# Altium PCB LCD-Controller.PcbDoc (part 2 of 3)
Units mm, origin at the board's own origin, x right, y up, seen from the top; angles counter-clockwise.
Board outline 100.3 x 38.1 mm, 4 copper layers (Top Layer, Signal Layer 1, Signal Layer 2, Bottom Layer), stack 0.778 mm thick; 118 components, 92 nets, 506 pads, 174 vias.
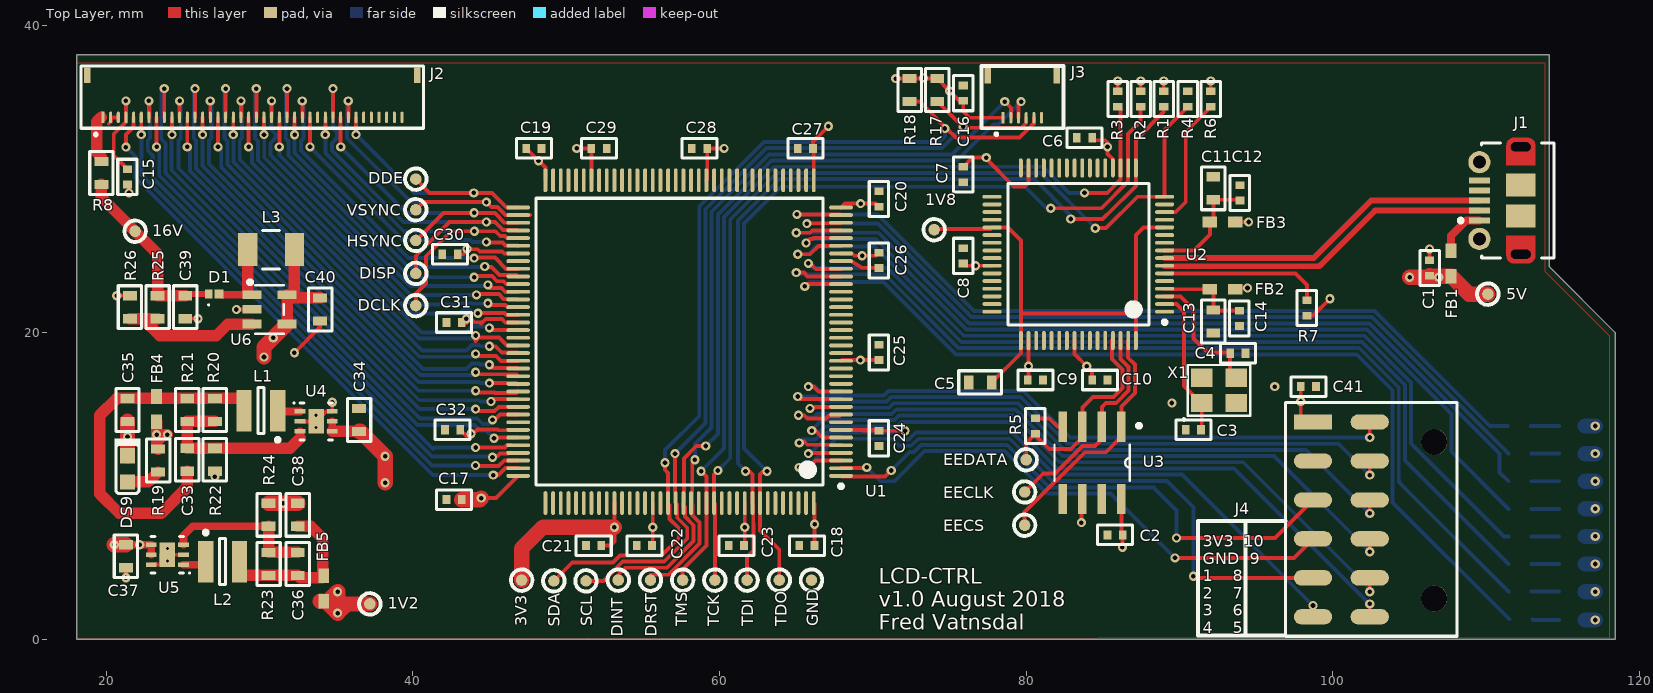
[diagram p0: Top Layer view]

## Part data (continued)
R8: library part ERA3AEB391V, "PANASONIC ELECTRONIC COMPONENTS         ERA3AEB391V             SMD Chip Resistor, Thin Film, 390 ohm, 75 V, 0603 [1608 Metric], 100 mW,  0.1%, ERA Series", Case/Package=0603, Case Code (Metric)=1608, Manufacturer=Panasonic, Max Operating Temperature=155°C, Max Power Dissipation=100mW, Min Operating Temperature=-55°C, Package Quantity=1, Resistance=390R, Supplier Part Number 1=P390DBDKR-ND, Temperature Coefficient=25ppm/°C, Tolerance=0.1%, Voltage Rating=75V, Case Code (Imperial)=0603, ComponentLink1Description=https://datasheet.ciiva.com/6001/485442-6001685.pdf, ComponentLink1URL=https://datasheet.ciiva.com/6001/485442-6001685.pdf, ComponentLink2Description=https://datasheet.ciiva.com/6001/485442-6001686.pdf, ComponentLink2URL=https://datasheet.ciiva.com/6001/485442-6001686.pdf, ComponentLink3Description=https://datasheet.ciiva.com/9182/aoa0000ce26-9182342.pdf, ComponentLink3URL=https://datasheet.ciiva.com/9182/aoa0000ce26-9182342.pdf, ComponentLink4Description=https://datasheet.ciiva.com/48425/era-eng-tds-48425462.pdf, ComponentLink4URL=https://datasheet.ciiva.com/48425/era-eng-tds-48425462.pdf, ComponentLink5Description=https://datasheet.ciiva.com/7909/485442-7909096.pdf, ComponentLink5URL=https://datasheet.ciiva.com/7909/485442-7909096.pdf, ComponentLink6Description=https://datasheet.ciiva.com/7909/485442-7909097.pdf, ComponentLink6URL=https://datasheet.ciiva.com/7909/485442-7909097.pdf, ComponentLink7Description=https://datasheet.ciiva.com/7909/485442-7909098.pdf, ComponentLink7URL=https://datasheet.ciiva.com/7909/485442-7909098.pdf, ComponentLink8Description=https://datasheet.ciiva.com/22737/39837-22737548.pdf, ComponentLink8URL=https://datasheet.ciiva.com/22737/39837-22737548.pdf, ComponentLink9Description=https://datasheet.ciiva.com/11808/0900766b80fe20f7-11808046.pdf, ComponentLink9URL=https://datasheet.ciiva.com/11808/0900766b80fe20f7-11808046.pdf, ComponentLink10Description=https://datasheet.ciiva.com/17205/aoa0000ce26-17205855.pdf, ComponentLink10URL=https://datasheet.ciiva.com/17205/aoa0000ce26-17205855.pdf, ComponentLink11Description=https://datasheet.ciiva.com/29183/450555-da-01-en-widerstand-0603-era-29183689.pdf, ComponentLink11URL=https://datasheet.ciiva.com/29183/450555-da-01-en-widerstand-0603-era-29183689.pdf, Composition="Thin Film", Contact Plating=Tin, Depth=0.8mm, Height=0.45mm, Lead Free="Lead Free", Length=1.6mm, Manufacturer Part Number=ERA3AEB391V, Military Standard=Not, Mount="Surface Mount", Number of Pins=2, Number of Terminations=2, Packaging="Tape and Reel", Power Rating=100mW, Pricing 1="1=0.41, 10=0.346, 100=0.1351, 1000=0.05655, 2500=0.05184 (USD)", Radiation Hardening=No, REACH SVHC="No SVHC", Stock 1=37643, Supplier 1=Digi-Key, Termination=Solder, Voltage Rating (DC)=75V, Width=0.8mm
R9 R10 R11 R12 R13 R14 R15 R16 R19: library part ERA-3AEB221V, "Res Thin Film 0603 220 Ohm 0.1% 1/10W ±25ppm/C Molded SMD Punched Carrier T/R", Case/Package=0603, Case Code (Metric)=1608, Manufacturer=Panasonic, Max Operating Temperature=155°C, Max Power Dissipation=100mW, Min Operating Temperature=-55°C, Package Quantity=1, Resistance=220R, Supplier Part Number 1=P220DBDKR-ND, Temperature Coefficient=25ppm/°C, Tolerance=0.1%, Voltage Rating=75V, Case Code (Imperial)=0603, ComponentLink1Description=https://datasheet.ciiva.com/30089/54aoa0000ce26-30089206.pdf, ComponentLink1URL=https://datasheet.ciiva.com/30089/54aoa0000ce26-30089206.pdf, ComponentLink2Description=https://datasheet.ciiva.com/11808/0900766b80fe20f7-11808055.pdf, ComponentLink2URL=https://datasheet.ciiva.com/11808/0900766b80fe20f7-11808055.pdf, ComponentLink3Description=https://datasheet.ciiva.com/48530/era-eng-tds-48530567.pdf, ComponentLink3URL=https://datasheet.ciiva.com/48530/era-eng-tds-48530567.pdf, ComponentLink4Description=https://datasheet.ciiva.com/9117/aoa0000ce26-9117624.pdf, ComponentLink4URL=https://datasheet.ciiva.com/9117/aoa0000ce26-9117624.pdf, ComponentLink5Description=https://datasheet.ciiva.com/22739/485442-22739289.pdf, ComponentLink5URL=https://datasheet.ciiva.com/22739/485442-22739289.pdf, ComponentLink6Description=https://datasheet.ciiva.com/7886/485442-7886586.pdf, ComponentLink6URL=https://datasheet.ciiva.com/7886/485442-7886586.pdf, ComponentLink7Description=https://datasheet.ciiva.com/9184/aoa0000ce26-9184316.pdf, ComponentLink7URL=https://datasheet.ciiva.com/9184/aoa0000ce26-9184316.pdf, ComponentLink8Description=https://datasheet.ciiva.com/43455/485442-43455212.pdf, ComponentLink8URL=https://datasheet.ciiva.com/43455/485442-43455212.pdf, ComponentLink9Description=https://datasheet.ciiva.com/6000/485442-6000910.pdf, ComponentLink9URL=https://datasheet.ciiva.com/6000/485442-6000910.pdf, ComponentLink10Description=https://datasheet.ciiva.com/17206/aoa0000ce26-17206814.pdf, ComponentLink10URL=https://datasheet.ciiva.com/17206/aoa0000ce26-17206814.pdf, ComponentLink11Description=https://datasheet.ciiva.com/48425/era-eng-tds-48425439.pdf, ComponentLink11URL=https://datasheet.ciiva.com/48425/era-eng-tds-48425439.pdf, ComponentLink12Description=https://datasheet.ciiva.com/29183/450451-da-01-en-widerstand-0603-era-29183676.pdf, ComponentLink12URL=https://datasheet.ciiva.com/29183/450451-da-01-en-widerstand-0603-era-29183676.pdf, Composition="Metal Film,Thin Film", Contact Plating=Tin, Depth=0.8mm, Features="Automotive AEC-Q200", Height=0.45mm, Lead Free="Lead Free", Length=1.6mm, Manufacturer Part Number=ERA-3AEB221V, Military Standard=Not, Mount="Surface Mount", Number of Pins=2, Number of Terminations=2, Packaging="Tape and Reel", Power Rating=100mW, Pricing 1="1=0.41, 10=0.346, 100=0.1351, 1000=0.05655, 2500=0.05184 (USD)", Radiation Hardening=No, REACH SVHC="No SVHC", Stock 1=240, Supplier 1=Digi-Key, Termination=SMD/SMT, Voltage Rating (DC)=75V, Width=0.8mm
R17 R18 R26: library part ERA-3AEB472V, "Res Thin Film 0603 4.7K Ohm 0.1% 0.1W(1/10W) ±25ppm/C Molded SMD Automotive Punched T/R", Case/Package=0603, Case Code (Metric)=1608, Manufacturer=Panasonic, Max Operating Temperature=155°C, Max Power Dissipation=100mW, Min Operating Temperature=-55°C, Package Quantity=5000, Resistance=4.7kR, Supplier Part Number 1=P4.7KDBDKR-ND, Temperature Coefficient=25ppm/°C, Tolerance=0.1%, Voltage Rating=75V, Case Code (Imperial)=0603, ComponentLink1Description=https://datasheet.ciiva.com/22743/485442-22743061.pdf, ComponentLink1URL=https://datasheet.ciiva.com/22743/485442-22743061.pdf, ComponentLink2Description=https://datasheet.ciiva.com/46422/485442-46422693.pdf, ComponentLink2URL=https://datasheet.ciiva.com/46422/485442-46422693.pdf, ComponentLink3Description=https://datasheet.ciiva.com/11808/0900766b80fe20f7-11808039.pdf, ComponentLink3URL=https://datasheet.ciiva.com/11808/0900766b80fe20f7-11808039.pdf, ComponentLink4Description=https://datasheet.ciiva.com/9116/aoa0000ce26-9116681.pdf, ComponentLink4URL=https://datasheet.ciiva.com/9116/aoa0000ce26-9116681.pdf, ComponentLink5Description=https://datasheet.ciiva.com/22781/485442-22781497.pdf, ComponentLink5URL=https://datasheet.ciiva.com/22781/485442-22781497.pdf, ComponentLink6Description=https://datasheet.ciiva.com/9117/aoa0000ce26-9117707.pdf, ComponentLink6URL=https://datasheet.ciiva.com/9117/aoa0000ce26-9117707.pdf, ComponentLink7Description=https://datasheet.ciiva.com/43455/485442-43455227.pdf, ComponentLink7URL=https://datasheet.ciiva.com/43455/485442-43455227.pdf, ComponentLink8Description=https://datasheet.ciiva.com/16772/70068849-16772572.pdf, ComponentLink8URL=https://datasheet.ciiva.com/16772/70068849-16772572.pdf, ComponentLink9Description=https://datasheet.ciiva.com/48425/era-eng-tds-48425470.pdf, ComponentLink9URL=https://datasheet.ciiva.com/48425/era-eng-tds-48425470.pdf, ComponentLink10Description=https://datasheet.ciiva.com/30078/54aoa0000ce26-30078815.pdf, ComponentLink10URL=https://datasheet.ciiva.com/30078/54aoa0000ce26-30078815.pdf, ComponentLink11Description=https://datasheet.ciiva.com/29183/451124-da-01-en-widerstand-0603-era-29183789.pdf, ComponentLink11URL=https://datasheet.ciiva.com/29183/451124-da-01-en-widerstand-0603-era-29183789.pdf, Composition="Metal Film,Thin Film", Contact Plating=Tin, Depth=0.8mm, Height=0.45mm, Lead Free="Lead Free", Length=1.6mm, Manufacturer Part Number=ERA-3AEB472V, Military Standard=Not, Mount="Surface Mount", Number of Pins=2, Number of Terminations=2, Packaging="Tape and Reel", Power Rating=100mW, Pricing 1="1=0.41, 10=0.346, 100=0.1351, 1000=0.05655, 2500=0.05184 (USD)", Radiation Hardening=No, REACH SVHC="No SVHC", Stock 1=123784, Supplier 1=Digi-Key, Termination=SMD/SMT, Voltage Rating (DC)=75V, Width=0.8mm, Working Voltage=75V
R20: library part ERJ-3EKF8203V, "RESISTOR, 0603, 0.1W, 1%, 820K", Case/Package=0603, Case Code (Metric)=1608, Manufacturer=Panasonic, Max Operating Temperature=155°C, Max Power Dissipation=100mW, Min Operating Temperature=-55°C, Package Quantity=1, Resistance=820kR, Supplier Part Number 1=P820KHCT-ND, Temperature Coefficient=100ppm/°C, Tolerance=1%, Voltage Rating=75V, Case Code (Imperial)=0603, ComponentLink1Description=https://datasheet.ciiva.com/22681/1678782-22681190.pdf, ComponentLink1URL=https://datasheet.ciiva.com/22681/1678782-22681190.pdf, ComponentLink2Description=https://datasheet.ciiva.com/9179/aoa0000ce2-9179848.pdf, ComponentLink2URL=https://datasheet.ciiva.com/9179/aoa0000ce2-9179848.pdf, ComponentLink3Description=https://datasheet.ciiva.com/30211/aoa0000ce2-30211400.pdf, ComponentLink3URL=https://datasheet.ciiva.com/30211/aoa0000ce2-30211400.pdf, ComponentLink4Description=https://datasheet.ciiva.com/22687/426256-22687466.pdf, ComponentLink4URL=https://datasheet.ciiva.com/22687/426256-22687466.pdf, ComponentLink5Description=https://datasheet.ciiva.com/24124/aoa0000ce2-24124218.pdf, ComponentLink5URL=https://datasheet.ciiva.com/24124/aoa0000ce2-24124218.pdf, ComponentLink6Description=https://datasheet.ciiva.com/7710/aoa0000ce2-7710765.pdf, ComponentLink6URL=https://datasheet.ciiva.com/7710/aoa0000ce2-7710765.pdf, ComponentLink7Description=https://datasheet.ciiva.com/9179/aoa0000ce2-9179854.pdf, ComponentLink7URL=https://datasheet.ciiva.com/9179/aoa0000ce2-9179854.pdf, ComponentLink8Description=https://datasheet.ciiva.com/16781/70260748-16781326.pdf, ComponentLink8URL=https://datasheet.ciiva.com/16781/70260748-16781326.pdf, Composition="Thick Film", Contact Plating=Tin, Depth=0.8mm, Features="Automotive AEC-Q200", Height=0.022inch, Length=1.6mm, Manufacturer Part Number=ERJ-3EKF8203V, Military Standard=Not, Mount="Surface Mount", Number of Pins=2, Number of Terminations=2, Packaging="Tape and Reel", Power Rating=100mW, Pricing 1="1=0.1, 10=0.079, 100=0.0323, 1000=0.01449, 2500=0.01258 (USD)", REACH SVHC=Yes, Stock 1=143016, Supplier 1=Digi-Key, Termination=SMD/SMT, Voltage Rating (DC)=75V, Weight=7.1E-05oz, Width=0.031inch
R21: library part ERJ-3EKF8203V, "RESISTOR, 0603, 0.1W, 1%, 820K", Case/Package=0603, Case Code (Metric)=1608, Manufacturer=Panasonic, Max Operating Temperature=155°C, Max Power Dissipation=100mW, Min Operating Temperature=-55°C, Package Quantity=1, Resistance=DNI, Supplier Part Number 1=P820KHCT-ND, Temperature Coefficient=100ppm/°C, Tolerance=1%, Voltage Rating=75V, Case Code (Imperial)=0603, ComponentLink1Description=https://datasheet.ciiva.com/22681/1678782-22681190.pdf, ComponentLink1URL=https://datasheet.ciiva.com/22681/1678782-22681190.pdf, ComponentLink2Description=https://datasheet.ciiva.com/9179/aoa0000ce2-9179848.pdf, ComponentLink2URL=https://datasheet.ciiva.com/9179/aoa0000ce2-9179848.pdf, ComponentLink3Description=https://datasheet.ciiva.com/30211/aoa0000ce2-30211400.pdf, ComponentLink3URL=https://datasheet.ciiva.com/30211/aoa0000ce2-30211400.pdf, ComponentLink4Description=https://datasheet.ciiva.com/22687/426256-22687466.pdf, ComponentLink4URL=https://datasheet.ciiva.com/22687/426256-22687466.pdf, ComponentLink5Description=https://datasheet.ciiva.com/24124/aoa0000ce2-24124218.pdf, ComponentLink5URL=https://datasheet.ciiva.com/24124/aoa0000ce2-24124218.pdf, ComponentLink6Description=https://datasheet.ciiva.com/7710/aoa0000ce2-7710765.pdf, ComponentLink6URL=https://datasheet.ciiva.com/7710/aoa0000ce2-7710765.pdf, ComponentLink7Description=https://datasheet.ciiva.com/9179/aoa0000ce2-9179854.pdf, ComponentLink7URL=https://datasheet.ciiva.com/9179/aoa0000ce2-9179854.pdf, ComponentLink8Description=https://datasheet.ciiva.com/16781/70260748-16781326.pdf, ComponentLink8URL=https://datasheet.ciiva.com/16781/70260748-16781326.pdf, Composition="Thick Film", Contact Plating=Tin, Depth=0.8mm, Features="Automotive AEC-Q200", Height=0.022inch, Length=1.6mm, Manufacturer Part Number=ERJ-3EKF8203V, Military Standard=Not, Mount="Surface Mount", Number of Pins=2, Number of Terminations=2, Packaging="Tape and Reel", Power Rating=100mW, Pricing 1="1=0.1, 10=0.079, 100=0.0323, 1000=0.01449, 2500=0.01258 (USD)", REACH SVHC=Yes, Stock 1=143016, Supplier 1=Digi-Key, Termination=SMD/SMT, Voltage Rating (DC)=75V, Weight=7.1E-05oz, Width=0.031inch
R22 R23 R24: library part ERA-3AEB184V, "RESISTOR, 0603, 180K, 0.1%, 0.1W", Case/Package=0603, Case Code (Metric)=1608, Manufacturer=Panasonic, Max Operating Temperature=155°C, Max Power Dissipation=100mW, Min Operating Temperature=-55°C, Package Quantity=1, Resistance=180kR, Supplier Part Number 1=P180KDBCT-ND, Temperature Coefficient=25ppm/°C, Tolerance=0.1%, Voltage Rating=75V, Case Code (Imperial)=0603, ComponentLink1Description=https://datasheet.ciiva.com/9184/aoa0000ce26-9184949.pdf, ComponentLink1URL=https://datasheet.ciiva.com/9184/aoa0000ce26-9184949.pdf, ComponentLink2Description=https://datasheet.ciiva.com/16772/70068849-16772661.pdf, ComponentLink2URL=https://datasheet.ciiva.com/16772/70068849-16772661.pdf, ComponentLink3Description=https://datasheet.ciiva.com/16784/70068849-16784981.pdf, ComponentLink3URL=https://datasheet.ciiva.com/16784/70068849-16784981.pdf, ComponentLink4Description=https://datasheet.ciiva.com/11808/0900766b80fe20f7-11808022.pdf, ComponentLink4URL=https://datasheet.ciiva.com/11808/0900766b80fe20f7-11808022.pdf, ComponentLink5Description=https://datasheet.ciiva.com/5915/485442-5915161.pdf, ComponentLink5URL=https://datasheet.ciiva.com/5915/485442-5915161.pdf, ComponentLink6Description=https://datasheet.ciiva.com/48530/era-eng-tds-48530409.pdf, ComponentLink6URL=https://datasheet.ciiva.com/48530/era-eng-tds-48530409.pdf, ComponentLink7Description=https://datasheet.ciiva.com/5915/485442-5915162.pdf, ComponentLink7URL=https://datasheet.ciiva.com/5915/485442-5915162.pdf, ComponentLink8Description=https://datasheet.ciiva.com/48425/era-eng-tds-48425434.pdf, ComponentLink8URL=https://datasheet.ciiva.com/48425/era-eng-tds-48425434.pdf, ComponentLink9Description=https://datasheet.ciiva.com/5915/485442-5915163.pdf, ComponentLink9URL=https://datasheet.ciiva.com/5915/485442-5915163.pdf, ComponentLink10Description=https://datasheet.ciiva.com/22739/1776116-22739771.pdf, ComponentLink10URL=https://datasheet.ciiva.com/22739/1776116-22739771.pdf, ComponentLink11Description=https://datasheet.ciiva.com/43457/485442-43457755.pdf, ComponentLink11URL=https://datasheet.ciiva.com/43457/485442-43457755.pdf, ComponentLink12Description=https://datasheet.ciiva.com/30236/54aoa0000ce26-30236957.pdf, ComponentLink12URL=https://datasheet.ciiva.com/30236/54aoa0000ce26-30236957.pdf, ComponentLink13Description=https://datasheet.ciiva.com/9116/aoa0000ce26-9116670.pdf, ComponentLink13URL=https://datasheet.ciiva.com/9116/aoa0000ce26-9116670.pdf, ComponentLink14Description=https://datasheet.ciiva.com/17207/aoa0000ce26-17207198.pdf, ComponentLink14URL=https://datasheet.ciiva.com/17207/aoa0000ce26-17207198.pdf, ComponentLink15Description=https://datasheet.ciiva.com/29183/451748-da-01-en-widerstand-0603-era-29183884.pdf, ComponentLink15URL=https://datasheet.ciiva.com/29183/451748-da-01-en-widerstand-0603-era-29183884.pdf, Composition="Metal Film,Thin Film", Contact Plating=Tin, Depth=0.8mm, Features="Automotive AEC-Q200", Height=0.45mm, Lead Free="Lead Free", Length=1.6mm, Manufacturer Part Number=ERA-3AEB184V, Military Standard=Not, Mount="Surface Mount", Number of Pins=2, Number of Terminations=2, Packaging="Tape and Reel", Power Rating=100mW, Pricing 1="1=0.41, 10=0.346, 100=0.1351, 1000=0.05655, 2500=0.05184 (USD)", Radiation Hardening=No, REACH SVHC="No SVHC", Stock 1=101770, Supplier 1=Digi-Key, Termination=SMD/SMT, Voltage Rating (DC)=75V, Width=0.8mm
R25: library part ERJ-3EKF5602V, "PANASONIC ELECTRONIC COMPONENTS         ERJ3EKF5602V.             SMD Chip Resistor, Thick Film, 56 kohm, 75 V, 0603 [1608 Metric], 100 mW,  1%, ERJ3E Series", Case/Package=0603, Case Code (Metric)=1608, Manufacturer=Panasonic, Max Operating Temperature=155°C, Max Power Dissipation=100mW, Min Operating Temperature=-55°C, Package Quantity=1, Resistance=56kR, Supplier Part Number 1=P56.0KHDKR-ND, Temperature Coefficient=100ppm/°C, Tolerance=1%, Voltage Rating=75V, Case Code (Imperial)=0603, ComponentLink1Description=https://datasheet.ciiva.com/9188/aoa0000ce2-9188742.pdf, ComponentLink1URL=https://datasheet.ciiva.com/9188/aoa0000ce2-9188742.pdf, ComponentLink2Description=https://datasheet.ciiva.com/16757/70260748-16757718.pdf, ComponentLink2URL=https://datasheet.ciiva.com/16757/70260748-16757718.pdf, ComponentLink3Description=https://datasheet.ciiva.com/24069/aoa0000ce2-24069910.pdf, ComponentLink3URL=https://datasheet.ciiva.com/24069/aoa0000ce2-24069910.pdf, ComponentLink4Description=https://datasheet.ciiva.com/22684/1678782-22684791.pdf, ComponentLink4URL=https://datasheet.ciiva.com/22684/1678782-22684791.pdf, ComponentLink5Description=https://datasheet.ciiva.com/16514/aoa0000ce2-16514104.pdf, ComponentLink5URL=https://datasheet.ciiva.com/16514/aoa0000ce2-16514104.pdf, ComponentLink6Description=https://datasheet.ciiva.com/30089/aoa0000ce2-30089321.pdf, ComponentLink6URL=https://datasheet.ciiva.com/30089/aoa0000ce2-30089321.pdf, ComponentLink7Description=https://datasheet.ciiva.com/46373/1678782-46373897.pdf, ComponentLink7URL=https://datasheet.ciiva.com/46373/1678782-46373897.pdf, ComponentLink8Description=https://datasheet.ciiva.com/46373/1678782-46373898.pdf, ComponentLink8URL=https://datasheet.ciiva.com/46373/1678782-46373898.pdf, ComponentLink9Description=https://datasheet.ciiva.com/7886/aoa0000ce2-7886732.pdf, ComponentLink9URL=https://datasheet.ciiva.com/7886/aoa0000ce2-7886732.pdf, ComponentLink10Description=https://datasheet.ciiva.com/16765/70260748-16765709.pdf, ComponentLink10URL=https://datasheet.ciiva.com/16765/70260748-16765709.pdf, ComponentLink11Description=https://datasheet.ciiva.com/28590/1678782-28590957.pdf, ComponentLink11URL=https://datasheet.ciiva.com/28590/1678782-28590957.pdf, ComponentLink12Description=https://datasheet.ciiva.com/48531/aoa0000ce2-48531022.pdf, ComponentLink12URL=https://datasheet.ciiva.com/48531/aoa0000ce2-48531022.pdf, Composition="Thick Film", Contact Plating=Tin, Depth=0.8mm, Features="Automotive AEC-Q200", Height=0.022inch, Lead Free="Lead Free", Length=1.6mm, Manufacturer Part Number=ERJ-3EKF5602V, Military Standard=Not, Mount="Surface Mount", Number of Pins=2, Number of Terminations=2, Packaging="Tape and Reel", Power Rating=100mW, Pricing 1="1=0.1, 10=0.079, 100=0.0323, 1000=0.01449, 2500=0.01258 (USD)", Radiation Hardening=No, REACH SVHC="No SVHC", Stock 1=563407, Supplier 1=Digi-Key, Termination=SMD/SMT, Voltage Rating (DC)=75V, Width=0.8mm
U1: library part CMP-0111-00327-1, "MachXO2 High Performance CPLD with 6864 LUTs, 1.2V, 144-pin TQFP, Speed Grade-4, Commercial Grade, Halogen Free (RoHS)", Code_JEDEC=MS-026-BFB, DatasheetVersion="ver01.0, Nov-2010", PackageDescription="144-Pin Thin Quad Flat Pack (TQFP144)", PackageReference=TQFP144, PackageVersion="ver02.6, Nov-2010", PartId=1
U2: library part CMP-2000-06287-1, "Dual High Speed USB to Multipurpose UART / FIFO IC / , 3 to 3.6 V, -40 to 85 degC, 64- Pin LQFP, RoHS", Manufacturer=FTDI, Maximum Operating Temperature=+85°C, Minimum Operating Temperature=-40°C, Package Description="64-Pin Low-profile Quad Flat Package, Body 10 x 10 mm, Pitch 0.5 mm", Package Reference=LQFP-64, Package Type=LQFP, Datasheet URL=http://www.ftdichip.com/Support/Documents/DataSheets/ICs/DS_FT2232H.pdf, Datasheet Version="Rev. 2.5, 07/2016", Dimensions=10x10x1.4mm, Height=1.4mm, Length=10mm, Manufacturer URL=http://www.nxp.com/, Maximum Data Rate=480Mbit/s, Mounting Technology=SurfaceMount, Mounting Type=SurfaceMount, Number of Channels per Chip=2, PartId=1, Pin Count=64, Standard Supported=RS232,RS422,RS485, Width=10mm
U3: "Imported", RefDes=RefDes, Type=DEV
U4 U5: library part CMP-0323-00361-1, "Buck Step Down Regulator with 2.3 to 6 V Input and 0.6 to 6 V Output, -40 to 85 degC, 6-Pin SON (DRV), Green (RoHS & no Sb/Br)", Manufacturer="Texas Instruments", Rating=Catalog, Switch Current Limit(Typ)(A)=1.4, ComponentLink1Description=Datasheet, ComponentLink1URL=http://www.ti.com/general/docs/lit/getliterature.tsp?genericPartNumber=TPS62290&fileType=pdf, ComponentLink2Description="URL Link1", ComponentLink2URL="Samples URL:http://www.ti.com/product/tps62290#samples", DatasheetVersion=SLVS764C, Duty Cycle(Max)(%)=100, Eco-Plan="Green (RoHS & no Sb/Br)", Iout(Max)(A)=1, Iq(Typ)(mA)=0.015, Mounting Technology="Surface Mount", PackageDescription="6-Pin Plastic Small Outline No-Lead, 2 x 2 x 0.8 mm Body, 0.65 mm Pitch, Exposed Pad", PackageReference=DRV6-1600X1000TP, PackageVersion="revE, Oct-2010", PartNumber=TPS62290DRVR, Regulated Outputs(#)=1, SubFamily="Step-Down Regulator", Synchronous Rectification=TRUE, Topology=Buck, Vin(Max)(V)=6, Vin(Min)(V)=2.3, Vout(Max)(V)=6, Vout(Min)(V)=0.6
U6: "Imported", Manufacturer_Part_Number=mic2288yd5, RefDes=RefDes, Type=DEV, Vendor=Microchip
X1: "12MHz ±30ppm Crystal 18pF 100 Ohm -20°C ~ 70°C  Surface Mount 4-SMD, No Lead (DFN, LCC)", Case/Package=SMD/SMT, ESR (Equivalent Series Resistance)=100R, Frequency=12MHz, Frequency Stability=30ppm, Load Capacitance=18pF, Manufacturer=TXC, Max Operating Temperature=70°C, Min Operating Temperature=-20°C, Package Quantity=3000, Supplier Part Number 1=887-1121-6-ND, ComponentLink1Description=https://datasheet.ciiva.com/855/7m-855345.pdf, ComponentLink1URL=https://datasheet.ciiva.com/855/7m-855345.pdf, ComponentLink2Description=https://datasheet.ciiva.com/855/7m-855346.pdf, ComponentLink2URL=https://datasheet.ciiva.com/855/7m-855346.pdf, ComponentLink3Description=https://datasheet.ciiva.com/855/7m-855347.pdf, ComponentLink3URL=https://datasheet.ciiva.com/855/7m-855347.pdf, ComponentLink4Description=https://datasheet.ciiva.com/46431/7m-46431979.pdf, ComponentLink4URL=https://datasheet.ciiva.com/46431/7m-46431979.pdf, ComponentLink5Description=https://datasheet.ciiva.com/1356/number-crystal-basic-1356573.pdf, ComponentLink5URL=https://datasheet.ciiva.com/1356/number-crystal-basic-1356573.pdf, Depth=2.5mm, Frequency Tolerance=30ppm, Height=0.031inch, Lead Free="Lead Free", Length=3.2mm, Manufacturer Part Number=7M-12.000MAAJ-T, Mount="Surface Mount", Number of Pins=4, Packaging="Tape and Reel", Pricing 1="1=1, 10=0.886, 50=0.8278, 100=0.7315, 500=0.693, 1000=0.5775 (USD)", REACH SVHC="No SVHC", Stock 1=18420, Supplier 1=Digi-Key, Termination=SMD/SMT, Tolerance=30ppm, Width=0.098inch

## Via types
v1: diameter 0.6, hole 0.3, Top Layer to Bottom Layer, 170 vias
v2: diameter 0.5, hole 0.2, Top Layer to Bottom Layer, 4 vias

## Nets (pads, with @x,y where several pads share a name; then routed paths per layer and width w, separated by ;. In a path a pad name is that pad's centre, name@x,y a point inside that pad or via, vN(x,y) a via of type N, cw(c..) or ccw(c..) an arc to the next point about the centre after c; other vN are vias at no path point)
1V2: 1V2.1 C17.1 C18.1 C19.1 C20.1 FB5.2 U1.36 U1.72 U1.108 U1.144 | length 18.6
  Top Layer w0.25: v1@44.462,9.238 v1(44.462,9.2) 45.425,9.2 U1.108@46.875,10.65 ; C19.1@47.4,32 48.65,30.75 U1.72@48.65,29.925 ; U1.144@66.15,8.875 66.2,8.825 v1(66.2,7.5) C18.1@66.2,6.1 ; U1.36@67.925,28.15 68.175,28.4 v1(69.2,28.4) 70.2,28.4 C20.1@70.4,28.2
  Top Layer w1: FB5.2@33.965,2.475 FB5.2@34.2,2.475 FB5.2@34.325,2.475 ; 1V2.1@37.2,2.3 35.7,2.3 v1(35.1,1.7) ; C17.1@43.2,9.1 44.362,9.1 v1(44.462,9.2) ; FB5.2@34.325,2.475 34.475,2.475 v1(35.1,3.1) v1(35.1,1.7) ; FB5.2@34.325,2.475 v1(35.1,1.7)
  other v1: 48.2,31.2
1V8: 1V8.1 C5.1 U2.12 U2.37 U2.49 U2.64 | length 32.6
  Top Layer w0.254: 1V8.1@74,26.7 74,26.752 77.677,26.752 U2.37@77.775,26.85 78.8,26.85 79.65,26 79.65,21.246 ; C5.1@77.75,16.743 79.65,18.643 U2.49@79.65,19.475 79.65,21.246 ; U2.64@87.15,19.475 87.15,21.246 ; U2.12@89.025,26.85 87.65,26.85 87.15,26.35 87.15,21.246 ; 79.65,21.246 87.15,21.246